# Altium PCB retic.PcbDoc
Units mil, origin at the board's own origin, x right, y up, seen from the top; angles counter-clockwise.
Board outline 4500 x 4100 mil, 2 copper layers (Top Layer, Bottom Layer); 102 components, 91 nets, 281 pads, 0 vias.
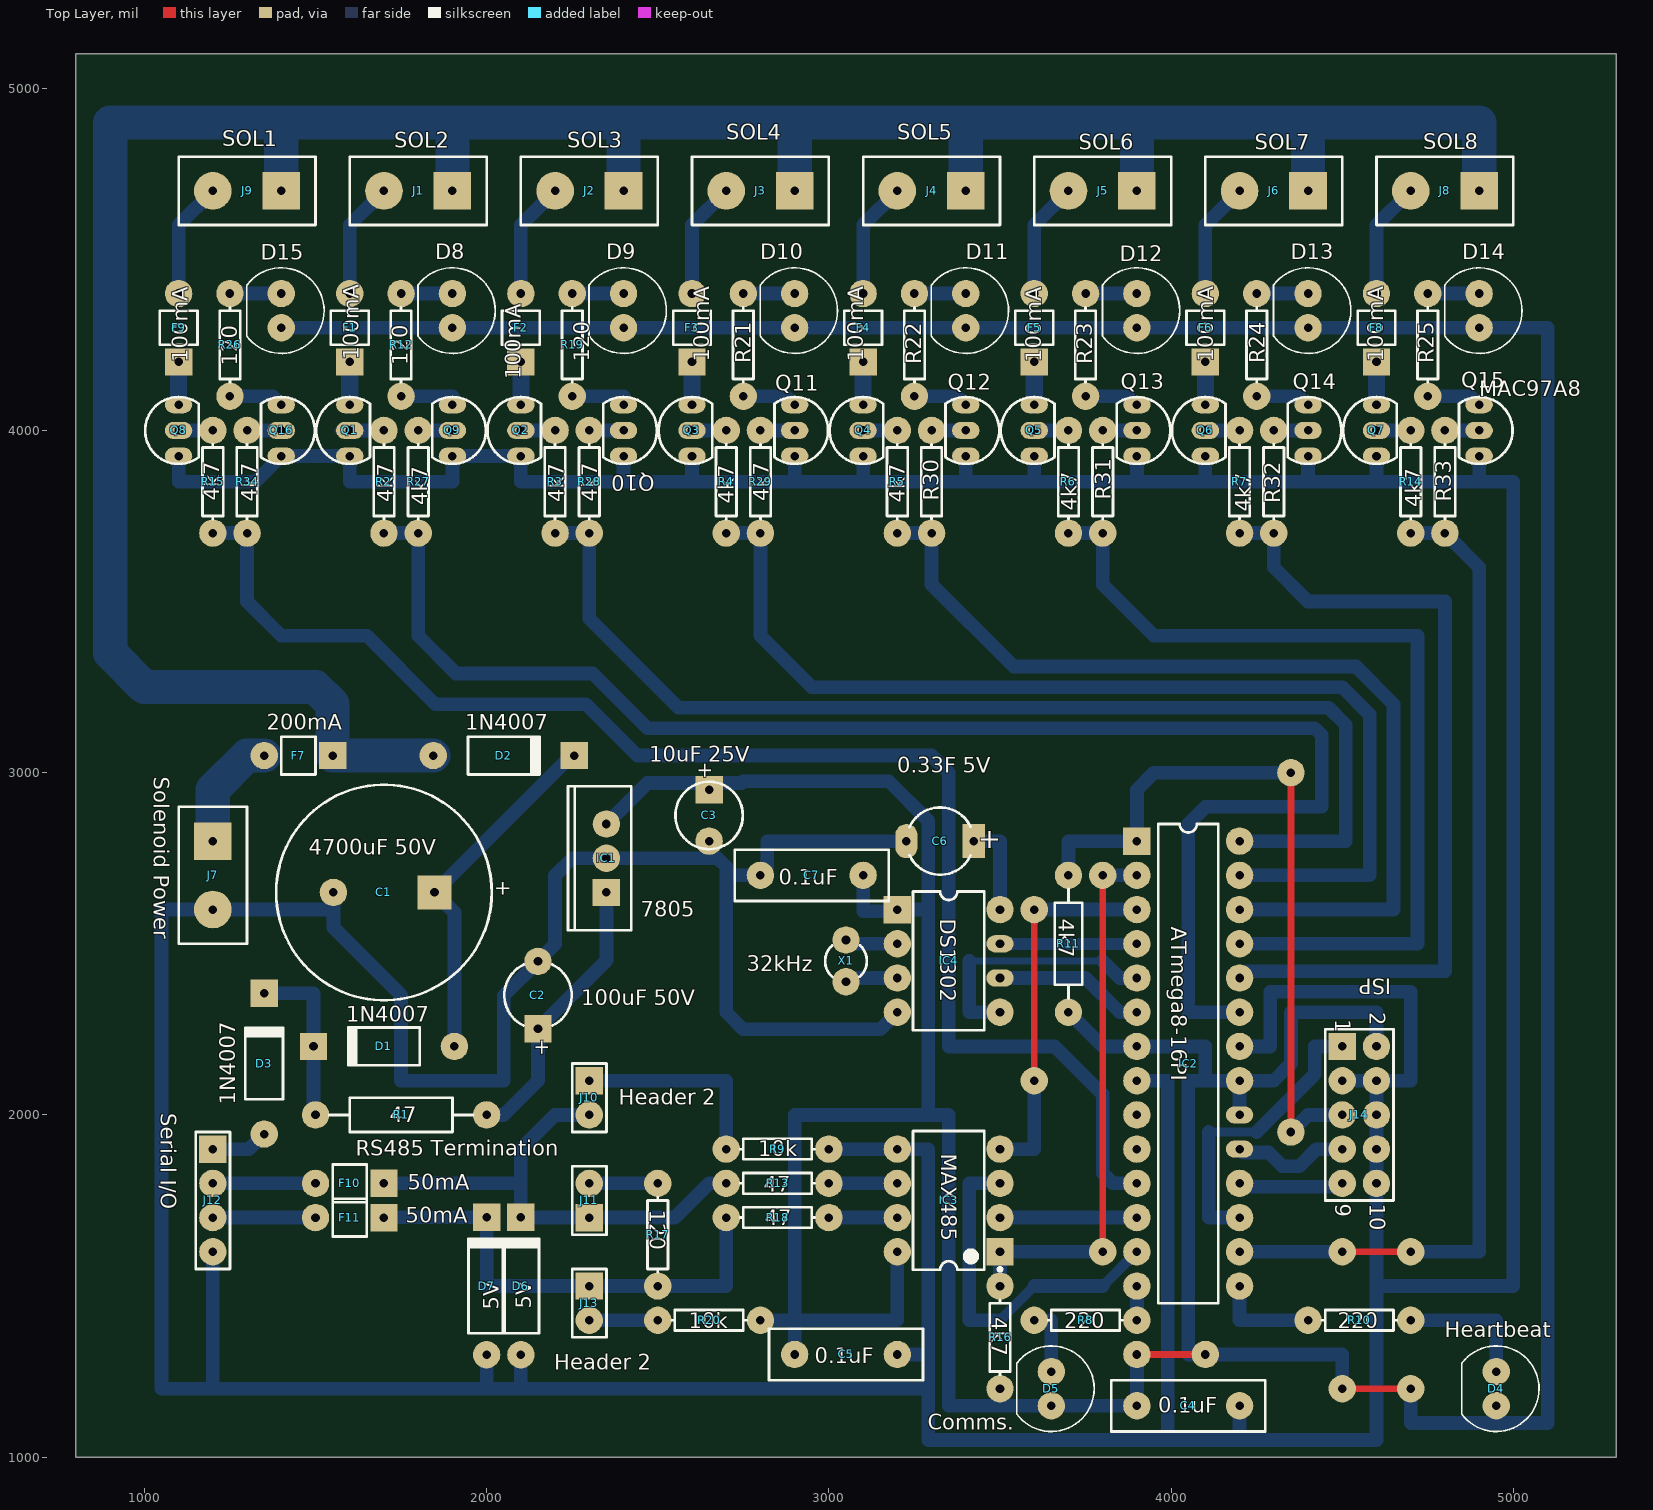
[diagram p0: Top Layer view]
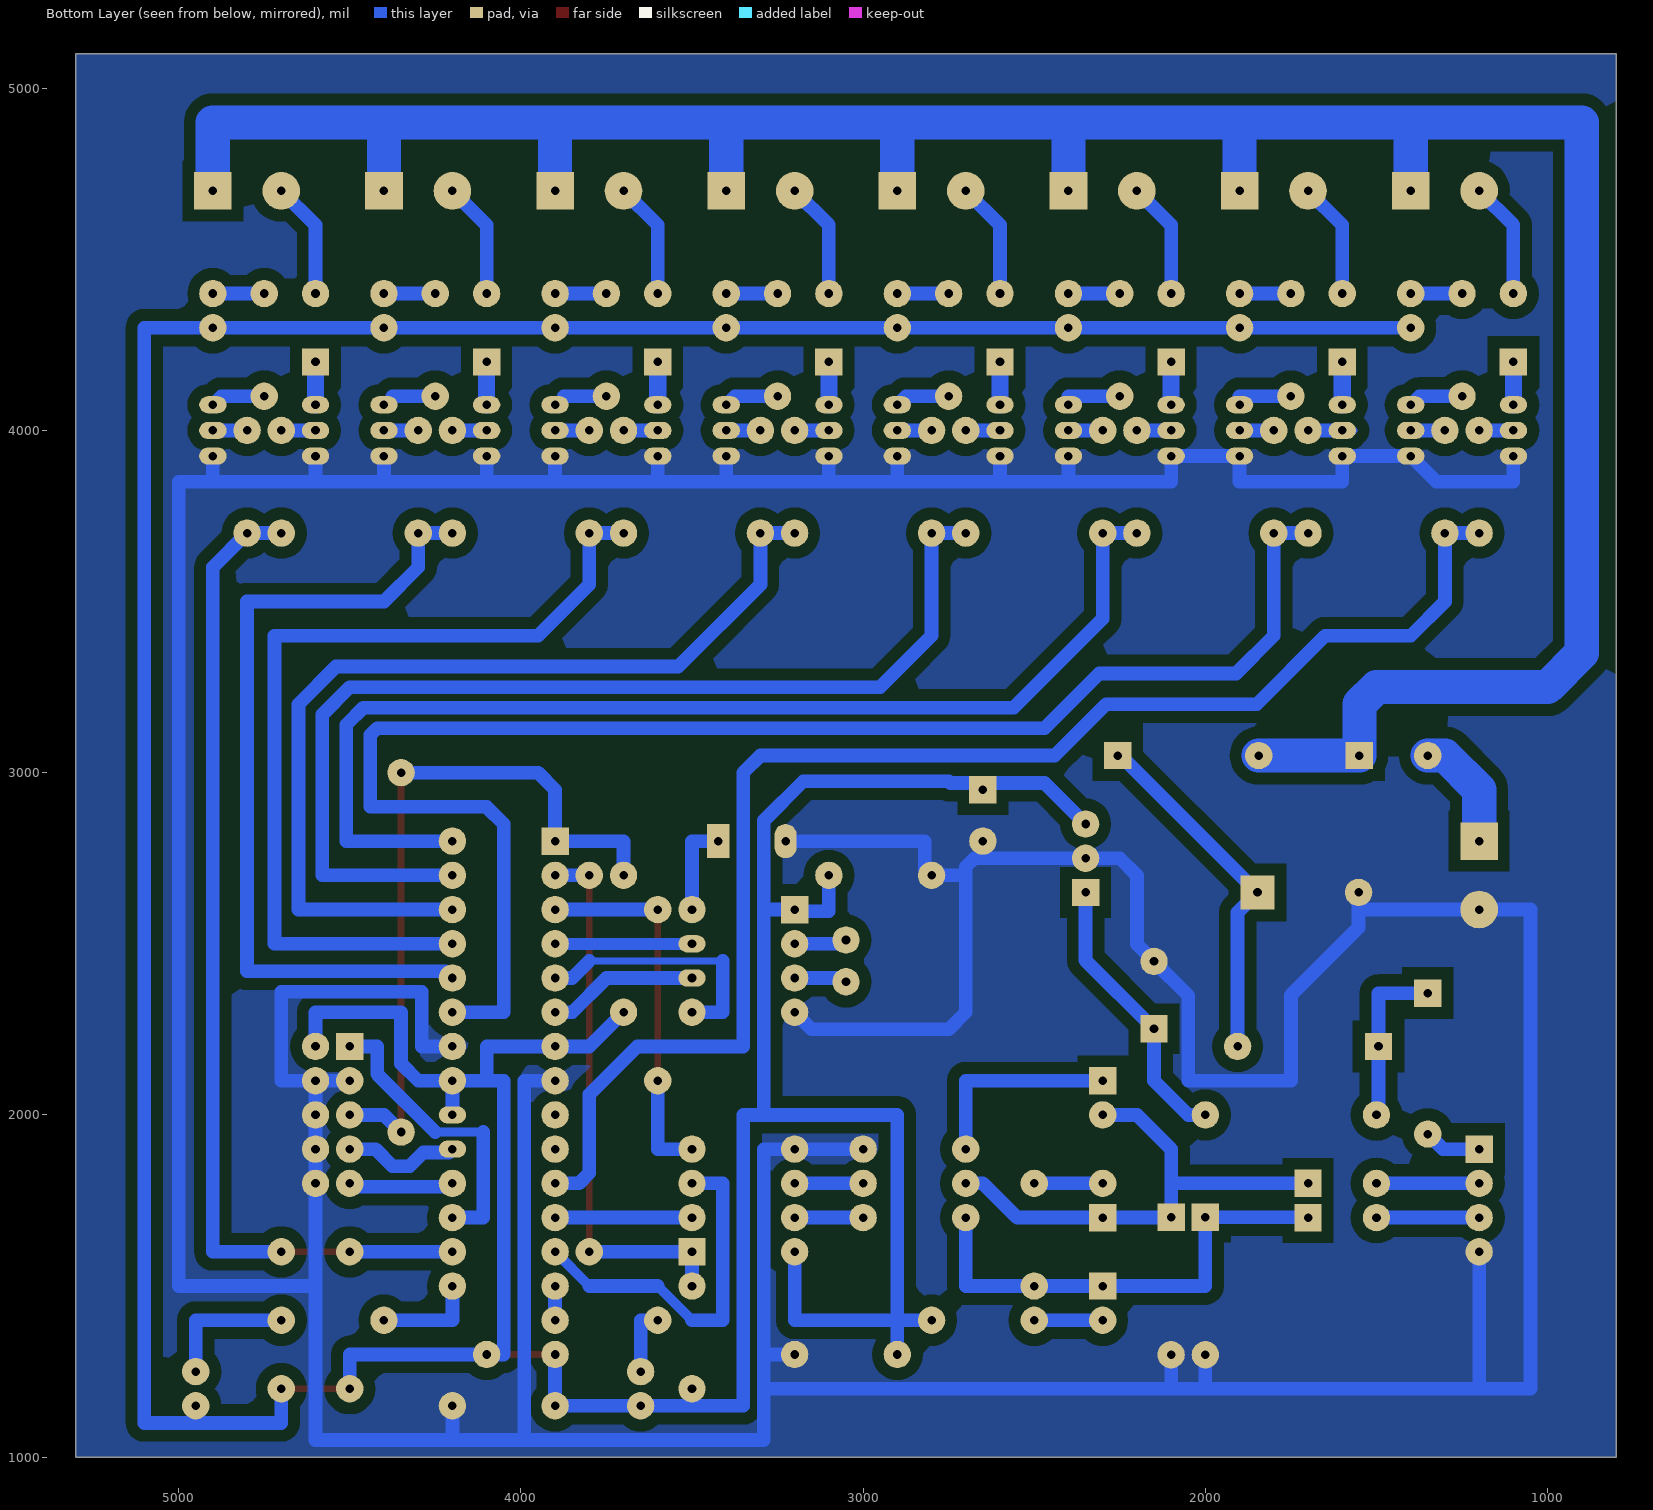
[diagram p1: Bottom Layer view, seen from below]

## Layer stack, top to bottom
Top Layer: signal copper 1.4
Dielectric: dielectric 12.6, FR-4, Dk 4.8
Bottom Layer: signal copper 1.4

## Board outline
800,1000 5300,1000 5300,5100 800,5100

## Design rules (kind name [scope] priority, off if disabled: settings)
Clearance [All] p1: gap=35
PolygonConnect [All] p1: connectstyle=Direct reliefconductorwidth=10 reliefentries=4 polygonreliefangle="90 Angle"
RoutingVias [All] p1: holewidth=28 width=50 viastyle="Through Hole" minholewidth=28 minwidth=50 maxholewidth=28 maxwidth=50
SilkToSilkClearance [All] p1 off: silktosilkclearance=10
SilkscreenOverComponentPads [All] p1 off: minsilkscreentomaskgap=10
SolderMaskExpansion [All] p1: expansion=4
Width [All] p1: maxlimit=100 minlimit=40 preferedwidth=40
26 further rules are at their usual default settings.

## Components (designator, comment, footprint, x,y, rotation, side; value= is the part's Value field where it differs from the comment)
C1 "4700uF 50V" CAPPR7.5-16x35 1700,2650 r180 top
C2 "100uF 50V" CAPPR5-5x5#1 2150,2350 r90 top
C3 "10uF 25V" CAPPR2-5x6.8 2650,2875 r270 top
C4 "0.1uF" RAD-0.3 4050,1150 r180 top
C5 "0.1uF" RAD-0.3 3050,1300 r180 top
C6 "0.33F 5V" CAPPR5-5x5#2 3325,2800 r180 top
C7 "0.1uF" RAD-0.3 2950,2700 r0 top
D1 "1N4007" DIO10.46-5.3x2.8 1700,2200 r180 top
D2 "1N4007" DIO10.46-5.3x2.8 2050,3050 r0 top
D3 "1N4007" DIO10.46-5.3x2.8 1350,2150 r90 top
D4 "Heartbeat" LED-0 4950,1200 r90 top
D5 "Comms." LED-0 3650,1200 r90 top
D6 "5V" DIO10.2-7x2.7 2100,1500 r90 top
D7 "5V" DIO10.2-7x2.7 2000,1500 r90 top
D8 "LED0" LED-0 1900,4350 r90 top
D9 "LED0" LED-0 2400,4350 r90 top
D10 "LED0" LED-0 2900,4350 r90 top
D11 "LED0" LED-0 3400,4350 r90 top
D12 "LED0" LED-0 3900,4350 r90 top
D13 "LED0" LED-0 4400,4350 r90 top
D14 "LED0" LED-0 4900,4350 r90 top
D15 "LED0" LED-0 1400,4350 r90 top
F1 "100mA" PIN-W2/E2.8 1600,4300 r90 top
F2 "100mA" PIN-W2/E2.8 2100,4300 r90 top
F3 "100mA" PIN-W2/E2.8 2600,4300 r90 top
F4 "100mA" PIN-W2/E2.8 3100,4300 r90 top
F5 "100mA" PIN-W2/E2.8 3600,4300 r90 top
F6 "100mA" PIN-W2/E2.8 4100,4300 r90 top
F7 "200mA" PIN-W2/E2.8 1450,3050 r180 top
F8 "100mA" PIN-W2/E2.8 4600,4300 r90 top
F9 "100mA" PIN-W2/E2.8 1100,4300 r90 top
F10 "50mA" PIN-W2/E2.8 1600,1800 r180 top
F11 "50mA" PIN-W2/E2.8 1600,1700 r180 top
IC1 "7805" TO220 2350,2750 r90 top
IC2 "ATmega8-16PI" 28P3 4050,2150 r270 top
IC3 "MAX485" PA8 3350,1750 r180 top
IC4 "DS1302" DIP8 3350,2450 r270 top
J1 "SOL2" SCREW2 1900,4700 r180 top
J2 "SOL3" SCREW2 2400,4700 r180 top
J3 "SOL4" SCREW2 2900,4700 r180 top
J4 "SOL5" SCREW2 3400,4700 r180 top
J5 "SOL6" SCREW2 3900,4700 r180 top
J6 "SOL7" SCREW2 4400,4700 r180 top
J7 "Solenoid Power" SCREW2 1200,2800 r270 top
J8 "SOL8" SCREW2 4900,4700 r180 top
J9 "SOL1" SCREW2 1400,4700 r180 top
J10 "Header 2" HDR1X2 2300,2100 r270 top
J11 "RS485 Termination" HDR1X2 2300,1700 r90 top
J12 "Serial I/O" HDR1X4 1200,1900 r270 top
J13 "Header 2" HDR1X2 2300,1500 r270 top
J14 "ISP" HDR2X5 4500,2200 r270 top
Q1 "MAC97A8" T092 1600,4000 r0 top
Q2 "MAC97A8" T092 2100,4000 r0 top
Q3 "MAC97A8" T092 2600,4000 r0 top
Q4 "MAC97A8" T092 3100,4000 r0 top
Q5 "MAC97A8" T092 3600,4000 r0 top
Q6 "MAC97A8" T092 4100,4000 r0 top
Q7 "MAC97A8" T092 4600,4000 r0 top
Q8 "MAC97A8" T092 1100,4000 r0 top
Q9 "2N3904" T092 1900,4000 r180 top
Q10 "2N3904" T092 2400,4000 r180 top
Q11 "2N3904" T092 2900,4000 r180 top
Q12 "2N3904" T092 3400,4000 r180 top
Q13 "2N3904" T092 3900,4000 r180 top
Q14 "2N3904" T092 4400,4000 r180 top
Q15 "2N3904" T092 4900,4000 r180 top
Q16 "2N3904" T092 1400,4000 r180 top
R1 "47" AXIAL-0.5 1750,2000 r0 top
R2 "4k7" AXIAL-0.3 1700,3850 r90 top
R3 "4k7" AXIAL-0.3 2200,3850 r90 top
R4 "4k7" AXIAL-0.3 2700,3850 r90 top
R5 "4k7" AXIAL-0.3 3200,3850 r90 top
R6 "4k7" AXIAL-0.3 3700,3850 r90 top
R7 "4k7" AXIAL-0.3 4200,3850 r90 top
R8 "220" AXIAL-0.3 3750,1400 r180 top
R9 "10k" AXIAL-0.3 2850,1900 r0 top
R10 "220" AXIAL-0.3 4550,1400 r0 top
R11 "4k7" AXIAL-0.4 3700,2500 r270 top
R12 "120" AXIAL-0.3 1750,4250 r90 top
R13 "47" AXIAL-0.3 2850,1800 r0 top
R14 "4k7" AXIAL-0.3 4700,3850 r90 top
R15 "4k7" AXIAL-0.3 1200,3850 r90 top
R16 "4k7" AXIAL-0.3 3500,1350 r270 top
R17 "120" AXIAL-0.3 2500,1650 r90 top
R18 "47" AXIAL-0.3 2850,1700 r0 top
R19 "120" AXIAL-0.3 2250,4250 r90 top
R20 "10k" AXIAL-0.3 2650,1400 r180 top
R21 "120" AXIAL-0.3 2750,4250 r90 top
R22 "120" AXIAL-0.3 3250,4250 r90 top
R23 "120" AXIAL-0.3 3750,4250 r90 top
R24 "120" AXIAL-0.3 4250,4250 r90 top
R25 "120" AXIAL-0.3 4750,4250 r90 top
R26 "120" AXIAL-0.3 1250,4250 r90 top
R27 "4k7" AXIAL-0.3 1800,3850 r90 top
R28 "4k7" AXIAL-0.3 2300,3850 r90 top
R29 "4k7" AXIAL-0.3 2800,3850 r90 top
R30 "4k7" AXIAL-0.3 3300,3850 r90 top
R31 "4k7" AXIAL-0.3 3800,3850 r90 top
R32 "4k7" AXIAL-0.3 4300,3850 r90 top
R33 "4k7" AXIAL-0.3 4800,3850 r90 top
R34 "4k7" AXIAL-0.3 1300,3850 r90 top
X1 "32kHz" BCY-W2/D3.1 3050,2450 r0 top

## Footprints (in the part's own frame and the unit in brackets; to place one, negate y for a bottom-side part, rotate by r counter-clockwise, add the part's x,y. Pads: shape width x height; smd on the part's side, far side on the other; paste and mask are expansions set on the pad)
28P3 [mil] "DIP; 28 Leads; Row Spacing 7.62 mm; Pitch 2.54 mm"
  rect 80x80 hole 25: 1(-650,-150)
  round 80 hole 25: 2(-550,-150) 3(-450,-150) 4(-350,-150) 5(-250,-150) 6(-150,-150) 7(-50,-150) 8(50,-150) 9(150,-150) 10(250,-150) 11(350,-150) 12(450,-150) 13(550,-150) 14(650,-150) 15(650,150) 16(550,150) 17(450,150) 18(350,150) 21(50,150) 22(-50,150) 23(-150,150) 24(-250,150) 25(-350,150) 26(-450,150) 27(-550,150) 28(-650,150)
  oval 50x80 hole 25: 19(250,150) 20(150,150)
  silkscreen extent -700,-88 700,88
AXIAL-0.3 [mil] "Axial Device, Thru-Hole; 2 Leads; 0.3 in Pin Spacing"
  round 80 hole 25: 1(-150,0) 2(150,0)
  silkscreen extent -109,-30 109,30
AXIAL-0.4 [mil] "Axial Device, Thru-Hole; 2 Leads; 0.4 in Pin Spacing"
  round 80 hole 25: 1(-200,0) 2(200,0)
  silkscreen extent -160,-40 160,40
AXIAL-0.5 [mil] "Axial Device, Thru-Hole; 2 Leads; 0.5 in Pin Spacing"
  round 80 hole 25: 1(-250,0) 2(250,0)
  silkscreen extent -210,-50 210,50
BCY-W2/D3.1 [mil] "Crystal, Thru-Hole; 2 Leads; Body 3.1 x 8.2 mm (Dia.xH)"
  round 80 hole 25: 1(0,61.02) 2(0,-61.02)
  silkscreen extent -61,-47 61,46
CAPPR2-5x6.8 [mil] "Capacitor, Electrolytic, Radial; Body 5 x 6.8 mm (Dia.xH typ); Pin Spacing 2 mm (typ)"
  rect 80x80 hole 25: 1(-75,0)
  round 80 hole 25: 2(75,0)
  silkscreen extent -98,-98 98,98
CAPPR5-5x5#1 [mil] "Capacitor, Electrolytic, Radial; Body 5 x 5 mm (Dia.xH typ); Pin Spacing 5 mm (typ)"
  rect 80x80 hole 25: 1(-98.43,0)
  round 80 hole 25: 2(98.43,0)
  silkscreen extent -89,-98 89,98
CAPPR5-5x5#2 [mil] "Capacitor, Electrolytic, Radial; Body 5 x 5 mm (Dia.xH typ); Pin Spacing 5 mm (typ)"
  rect 65x100 hole 25: 1(-98.43,0)
  oval 65x100 hole 25: 2(98.43,0)
  silkscreen extent -89,-98 89,98
CAPPR7.5-16x35 [mil] "Capacitor, Electrolytic, Radial; Body 16 x 35 mm (Dia.xH typ); Pin Spacing 7.5 mm (typ)"
  rect 100x100 hole 25: 1(-147.64,0)
  round 80 hole 25: 2(147.64,0)
  silkscreen extent -315,-315 315,315
DIO10.2-7x2.7 [mil] "Diode, Axial; Body 7 x 2.7 mm (LxDia. max), Lead Dia. 0.53 mm (max)"
  round 80 hole 25: 1(-200.79,0)
  rect 80x80 hole 25: 2(200.79,0)
  silkscreen extent -138,-53 142,53
DIO10.46-5.3x2.8 [mil] "Diode, Axial; Body 5.2 x 2.7 mm (LxDia. max), Lead Dia. 0.86 mm (max)"
  round 80 hole 25: 1(-205.91,0)
  rect 80x80 hole 25: 2(205.91,0)
  silkscreen extent -104,-55 108,55
DIP8 [mil] "DIP; 8 Leads; Row Spacing 7.62 mm; Pitch 2.54 mm"
  rect 80x80 hole 25: 1(-150,-150)
  round 80 hole 25: 2(-50,-150) 3(50,-150) 4(150,-150) 5(150,150) 8(-150,150)
  oval 50x80 hole 25: 6(50,150) 7(-50,150)
  silkscreen extent -203,-104 203,104
HDR1X2 [mil] "Connector; Header; 2 Position"
  rect 80x80 hole 25: 1(0,0)
  round 80 hole 25: 2(100,0)
  silkscreen extent -50,-50 150,50
HDR1X4 [mil] "Connector; Header; 4 Position"
  rect 80x80 hole 25: 1(0,0)
  round 80 hole 25: 2(100,0) 3(200,0) 4(300,0)
  silkscreen extent -50,-50 350,50
HDR2X5 [mil] "Connector; Header; 5x2 Position"
  rect 80x80 hole 25: 1(0,0)
  round 80 hole 25: 2(0,100) 3(100,0) 4(100,100) 5(200,0) 6(200,100) 7(300,0) 8(300,100) 9(400,0) 10(400,100)
  silkscreen extent -50,-50 450,150
LED-0 [mil] "Typical INFRARED GaAs LED; 2 Leads"
  round 80 hole 25: 1(50,0) 2(-50,0)
  silkscreen extent -125,-125 125,101
PA8 [mil] "DIP, 8-Leads, Row Spacing 7.62mm, Pitch 2.54mm, Body 9.38x7.24mm"
  rect 80x80 hole 25: 1(-150,150)
  round 80 hole 25: 2(-150,50) 3(-150,-50) 4(-150,-150) 5(150,-150) 6(150,-50) 7(150,50) 8(150,150)
  silkscreen extent -155,-203 104,206, body extent -142,-203 142,203, height 180
PIN-W2/E2.8 [mil] "Fuse; 2 Leads"
  rect 80x80 hole 25: 1(-100,0)
  round 80 hole 25: 2(100,0)
  silkscreen extent -50,-55 50,55
RAD-0.3 [mil] "Radial Cap, Thru-Hole; 2 Leads; 0.3 in Pin Spacing"
  round 80 hole 25: 1(-150,0) 2(150,0)
  silkscreen extent -225,-75 225,75
SCREW2 [mil] "Connector; Header; 2 Position"
  rect 110x110 hole 25: 1(0,0)
  round 110 hole 25: 2(200,0)
  silkscreen extent -100,-100 300,100
T092 [mil] "TO, Flat Index; 3 In-Line, Axial Leads; Body Dia. 4.7mm; Leads 0.56 x 0.51 mm (max)"
  oval 80x50 hole 25: 1(0,75) 2(0,0) 3(0,-75)
  silkscreen extent -98,-98 59,98
TO220 [mil] "TO, Thru-Hole, Vertical, Heatsink Mounted; 3 In-Line Leads; Pitch 2.54 mm"
  rect 80x80 hole 25: 1(-100,0)
  round 80 hole 25: 2(0,0) 3(100,0)
  silkscreen extent -211,-73 211,112

## Part data
C1 C2 C3 C6: library part "Cap Pol2", "Polarized Capacitor (Axial)"
C4 C5 C7: library part Cap, "Capacitor"
D1 D2 D3: library part "Diode 1N4007", "1 Amp General Purpose Rectifier"
D4 D5: library part LED1, "Typical RED GaAs LED"
D6 D7: library part Tranzorb, "Tranzorb"
D8 D9 D10 D11 D12 D13 D14 D15: "Typical INFRARED GaAs LED"
F1 F2 F3 F4 F5 F6 F7 F8 F9 F10 F11: library part "Fuse Thermal", "Thermal Fuse"
IC1: library part "Volt Reg", "Voltage Regulator"
IC2: "8-Bit AVR Microcontroller with 8K Bytes of In-System Programmable Flash Memory"
IC3: library part MAX485EPA, "Low-Power, Slew-Rate-Limited RS-485/RS-422 Transceiver"
IC4: "Trickle Charge Timekeeping Chip"
J1 J2 J3 J4 J5 J6 J7 J8 J9 J11: library part "Header 2", "Header, 2-Pin"
J10 J13: "Header, 2-Pin"
J12: library part "Header 4", "Header, 4-Pin"
J14: library part "Header 5X2", "Header, 5-Pin, Dual row"
Q1 Q2 Q3 Q4 Q5 Q6 Q7 Q8: library part Triac, "Silicon Bidirectional Triode Thyristor"
Q9 Q10 Q11 Q12 Q13 Q14 Q15 Q16: "NPN General Purpose Amplifier"
R1 R2 R3 R4 R5 R6 R7 R8 R9 R10 R11 R12 R13 R14 R15 R16 R17 R18 R19 R20 R21 R22 R23 R24 R25 R26 R27 R28 R29 R30 R31 R32 R33 R34: library part Res2, "Resistor"
X1: library part XTAL, "Crystal Oscillator"

## Free pads (board coordinates)
  round 80 hole 25: 0(4500,1600) 2(4700,1600) 6(3600,2600) 7(3600,2100) 8(3800,2700) 9(3800,1600) 10(4350,3000) 11(4350,1950) 12(4100,1300) 13(3900,1300) 14(4500,1200) 15(4700,1200)

## Nets (pads, with @x,y where several pads share a name; then routed paths per layer and width w, separated by ;. In a path a pad name is that pad's centre, name@x,y a point inside that pad or via, vN(x,y) a via of type N, cw(c..) or ccw(c..) an arc to the next point about the centre after c; other vN are vias at no path point)
+5V: C3.1 C4.2 C5.2 C7.2 D4.2 D5.2 D8.2 D9.2 D10.2 D11.2 D12.2 D13.2 D14.2 D15.2 IC1.3 IC2.7 IC2.20 IC2.21 IC3.8 IC4.1 J14.2 pad.12 pad.13 pad.14 pad.15 R11.2 R16.2 R20.1 | length 16201.5
  Top Layer w20: pad.13 pad.12 ; pad.14 pad.15
  Bottom Layer w40: D15.2 D8.2 D9.2 D10.2 D11.2 D12.2 D13.2 D14.2 5100,4300 5100,1100 4950,1100 ; IC1.3 2470,2970 2745,2970 2750,2975 3175,2975 3290,2860 3290,2600 ; R20.1 2900,1400 ; C5.2 2900,1400 ; C7.2 3100,2595.37 IC4.1@3195.37,2595.37 ; IC3.8 3200,1400 2900,1400 ; IC4.1 3290,2600 ; R16.2 3500,1150 ; R11.2 3800,2200 IC2.7 4100,2200 4100,2100 ; pad.13 C4.2 D5.2 3500,1150 ; IC2.20 IC2.21 ; pad.14 4500,1300 4050,1300 4050,2100 4100,2100 ; J14.2 4600,2300 4350,2300 4350,2150 4300,2100 IC2.21 ; pad.15 4700,1100 4950,1100 ; D4.2 4950,1100 ; 2900,1400 2900,2000 3290,2000 ; 3290,2000 3350,2000 3350,1150 3500,1150 ; 3290,2000 3290,2600 ; 4100,2100 IC2.21
DRV0: IC2.23 R2.1 R27.1 | length 4480.8
  Bottom Layer w40: R2.1 R27.1 1800,3400 1910,3290 2310,3290 2470,3130 4420,3130 4440,3110 4440,2900 4100,2900 4050,2850 4050,2300 IC2.23
DRV1: IC2.28 R3.1 R28.1 | length 3338.4
  Bottom Layer w40: R3.1 R28.1 2300,3450 2560,3190 4460,3190 4510,3140 4510,2800 IC2.28
DRV2: IC2.27 R4.1 R29.1 | length 3125.3
  Bottom Layer w40: R4.1 R29.1 2800,3400 2950,3250 4500,3250 4580,3170 4580,2700 IC2.27
DRV3: IC2.26 R5.1 R30.1 | length 2795
  Bottom Layer w40: R5.1 R30.1 3300,3550 3540,3310 4540,3310 4650,3200 4650,2600 IC2.26
DRV4: IC2.25 R6.1 R31.1 | length 2652.1
  Bottom Layer w40: R6.1 R31.1 3800,3550 3950,3400 4720,3400 4720,2500 IC2.25
DRV5: IC2.24 R7.1 R32.1 | length 2429.7
  Bottom Layer w40: IC2.24 4220,2420 4800,2420 4800,3500 4400,3500 4300,3600 R32.1 R7.1
DRV6: IC2.16 pad.0 pad.2 R14.1 R33.1 | length 2941.4
  Top Layer w20: pad.0 pad.2
  Bottom Layer w40: IC2.16 pad.0 ; pad.2 4900,1600 4900,3600 R33.1 R14.1
DRV7: IC2.11 R15.1 R34.1 | length 4207.5
  Bottom Layer w40: R15.1 R34.1 1300,3500 1400,3400 1650,3400 1850,3200 2290,3200 2440,3050 3300,3050 3350,3000 3350,2200 3660,2200 3800,2060 3800,1830 3830,1800 IC2.11
GND: C1.2 C2.2 C3.2 C4.1 C5.1 C6.2 C7.1 D6.1 D7.1 IC1.2 IC2.8 IC2.22 IC3.5 IC4.4 J7.2 J12.4 J14.3 J14.4 J14.6 J14.8 J14.10 Q1.3 Q2.3 Q3.3 Q4.3 Q5.3 Q6.3 Q7.3 Q8.3 Q9.1 Q10.1 Q11.1 Q12.1 Q13.1 Q14.1 Q15.1 Q16.1 R9.2 | length 22270.8
  Bottom Layer w40: Q8.3 1100,3850 1250,3850 ; J12.4 1200,1200 ; 1225,3850 1250,3850 ; Q16.1@1425,3925 Q16.1 ; 1550,2600 J7.2 1050,2600 1050,1200 1200,1200 ; C1.2 1552.36,2547.64 1750,2350 1750,2100 2050,2100 2050,2348.43 C2.2 2200,2498.43 2200,2700 2250,2750 IC1.2 2675,2750 2700,2725 2700,2700 ; Q9.1@1900,3920 1900,3850 1600,3850 Q1.3 Q16.1 ; 1950,3925 Q9.1 Q2.3 2100,3850 2400,3850 ; D7.1 2000,1200 ; D6.1 2100,1200 ; Q10.1 2400,3850 ; Q3.3@2600,3920 2600,3850 ; Q11.1@2900,3920 2900,3850 ; R9.2 IC3.5 3290,1900 3290,1300 ; Q4.3 3100,3850 ; C5.1 3290,1300 ; IC4.4 3150,2250 2750,2250 2700,2300 2700,2700 ; C6.2 2820,2800 2820,2720 C7.1 2700,2700 ; Q12.1@3400,3900 Q12.1@3400,3920 ; Q12.1 Q12.1@3400,3920 ; Q5.3 3600,3850 ; IC2.8 3990,2100 3990,1050 3290,1050 3290,1200 ; Q13.1 3900,3850 ; 4000,1050 4200,1050 ; Q6.3 4100,3850 ; C4.1 4200,1050 ; IC2.22 4290,2200 4290,2360 4700,2360 4700,2100 J14.4 ; Q14.1 4400,3850 ; J14.3 J14.4 ; Q7.3 4600,3850 ; Q15.1@4900,3900 4900,3850 ; 1200,1200 2000,1200 ; 1250,3850 1325,3850 Q16.1 ; 2000,1200 2100,1200 ; 2100,1200 3290,1200 ; 2400,3850 2600,3850 ; 2600,3850 2900,3850 ; 2900,3850 3100,3850 ; 3100,3850 3400,3850 ; 3290,1200 3290,1300 ; 3400,3850 Q12.1@3400,3920 ; 3400,3850 3600,3850 ; 3600,3850 3900,3850 ; 3900,3850 4100,3850 ; 4100,3850 4400,3850 ; 4200,1050 4600,1050 4600,1500 ; 4400,3850 4600,3850 ; 4600,1500 J14.10 J14.8 J14.6 J14.4 ; 4600,1500 5000,1500 5000,3850 4900,3850 ; 4600,3850 4900,3850
MISO: IC2.18 J14.9 | length 300
  Bottom Layer w40: IC2.18@4190,1790 J14.9@4490,1790
MOSI: IC2.17 J14.1 | length 880.4
  Bottom Layer w25: 4110,1950 4250,1950
  Bottom Layer w40: 4110,1950 4110,1700 IC2.17 ; 4250,1950 4420,2120 4420,2200 J14.1
NetC1_1: C1.1 D1.1 D2.2 | length 1048.1
  Bottom Layer w40: D1.1 1905.91,2591.73 C1.1 2247.64,3050 D2.2
NetC2_1: C2.1 IC1.1 R1.2 | length 824.3
  Bottom Layer w40: R1.2 2050,2000 2150,2100 C2.1 2350,2451.57 IC1.1
NetC6_1: C6.1 IC4.8 | length 276.6
  Bottom Layer w40: C6.1 3500,2800 IC4.8
NetD1_2: D1.2 D3.2 R1.1 | length 502.4
  Bottom Layer w40: D3.2 1494.09,2355.91 D1.2 1494.09,2005.91 R1.1
NetD3_1: D3.1 J12.1 | length 168.3
  Bottom Layer w40: J12.1 1305.91,1900 D3.1
NetD4_1: D4.1 R10.2 | length 400
  Bottom Layer w40: R10.2 4950,1400 D4.1
NetD5_1: D5.1 R8.2 | length 200
  Bottom Layer w40: R8.2 3650,1400 D5.1
NetD6_2: D6.2 F10.1 J10.2 J11.1 R13.1 | length 1482.4
  Bottom Layer w40: F10.1 2100,1800 ; J10.2 2200,2000 2100,1900 2100,1800 ; R13.1 2650,1800 2550,1700 J11.1 2100.79,1700 D6.2 2100,1800
NetD7_2: D7.2 F11.1 J13.1 R17.1 R18.1 | length 1400.8
  Bottom Layer w40: F11.1@1700,1700.79 D7.2 2000,1500 J13.1 R17.1 2700,1500 R18.1
NetD8_1: D8.1 R12.2 | length 150
  Bottom Layer w40: R12.2 D8.1
NetD9_1: D9.1 R19.2 | length 150
  Bottom Layer w40: R19.2 D9.1
NetD10_1: D10.1 R21.2 | length 150
  Bottom Layer w40: R21.2 D10.1
NetD11_1: D11.1 R22.2 | length 150
  Bottom Layer w40: R22.2 D11.1
NetD12_1: D12.1 R23.2 | length 150
  Bottom Layer w40: R23.2 D12.1
NetD13_1: D13.1 R24.2 | length 150
  Bottom Layer w40: R24.2 D13.1
NetD14_1: D14.1 R25.2 | length 150
  Bottom Layer w40: R25.2 D14.1
NetD15_1: D15.1 R26.2 | length 150
  Bottom Layer w40: R26.2 D15.1
NetF1_1: F1.1 Q1.1 | length 125
  Bottom Layer w50: Q1.1 F1.1
NetF1_2: F1.2 J1.2 | length 341.4
  Bottom Layer w40: F1.2 1600,4600 J1.2
NetF2_1: F2.1 Q2.1 | length 125
  Bottom Layer w50: Q2.1 F2.1
NetF2_2: F2.2 J2.2 | length 362.1
  Bottom Layer w40: F2.2 2100,4600 J2.2 J2.2@2200,4720.67
NetF3_1: F3.1 Q3.1 | length 125
  Bottom Layer w50: Q3.1 F3.1
NetF3_2: F3.2 J3.2 | length 362.1
  Bottom Layer w40: F3.2 2600,4500 ; 2600,4479.33 2600,4500 ; J3.2 2600,4600 2600,4500
NetF4_1: F4.1 Q4.1 | length 125
  Bottom Layer w50: Q4.1 F4.1
NetF4_2: F4.2 J4.2 | length 341.4
  Bottom Layer w40: F4.2 3100,4600 J4.2
NetF5_1: F5.1 Q5.1 | length 125
  Bottom Layer w50: Q5.1 F5.1
NetF5_2: F5.2 J5.2 | length 341.4
  Bottom Layer w40: F5.2 3600,4600 J5.2
NetF6_1: F6.1 Q6.1 | length 125
  Bottom Layer w50: Q6.1 F6.1
NetF6_2: F6.2 J6.2 | length 341.4
  Bottom Layer w40: F6.2 4100,4600 J6.2
NetF7_2: F7.2 J7.1 | length 341.4
  Bottom Layer w100: J7.1 1200,2950 1300,3050 F7.2
NetF8_1: F8.1 Q7.1 | length 125
  Bottom Layer w50: Q7.1 F8.1
NetF8_2: F8.2 J8.2 | length 341.4
  Bottom Layer w40: F8.2 4600,4600 J8.2
NetF9_1: F9.1 Q8.1 | length 125
  Bottom Layer w50: Q8.1 F9.1
NetF9_2: F9.2 J9.2 | length 341.4
  Bottom Layer w40: F9.2 1100,4600 J9.2
NetF10_2: F10.2 J12.2 | length 300
  Bottom Layer w40: J12.2 F10.2
NetF11_2: F11.2 J12.3 | length 300
  Bottom Layer w40: J12.3 F11.2
NetIC2_2: IC2.2 IC3.1 pad.8 pad.9 R16.1 | length 1600
  Top Layer w20: pad.9 pad.8
  Bottom Layer w40: R16.1 IC3.1 pad.9 ; pad.8 IC2.2
NetIC2_3: IC2.3 IC3.4 pad.6 pad.7 | length 1100
  Top Layer w20: pad.7 pad.6
  Bottom Layer w40: IC3.4 3600,1900 pad.7 ; pad.6 IC2.3
NetIC2_12: IC2.12 IC3.2 | length 400
  Bottom Layer w40: IC3.2 IC2.12
NetIC2_13: IC2.13 IC3.3 | length 1062.8
  Bottom Layer w30: 3500,1400 3600,1500 ; 3800,1500 IC2.13
  Bottom Layer w40: 3500,1400 3410,1400 3410,1800 IC3.3 ; 3600,1500 3800,1500
NetIC2_14: IC2.14 R8.1 | length 100
  Bottom Layer w40: R8.1 IC2.14
NetIC2_15: IC2.15 R10.1 | length 300
  Bottom Layer w40: IC2.15 4200,1400 R10.1
NetIC3_6: IC3.6 R13.2 | length 200
  Bottom Layer w40: R13.2 IC3.6
NetIC3_7: IC3.7 R18.2 | length 200
  Bottom Layer w40: R18.2 3100,1700 IC3.7
NetIC4_2: IC4.2 X1.1 | length 154.6
  Bottom Layer w40: X1.1 3061.02,2500 IC4.2
NetIC4_3: IC4.3 X1.2 | length 154.6
  Bottom Layer w40: X1.2 3061.02,2400 IC4.3
NetJ10_1: J10.1 R9.1 | length 600
  Bottom Layer w40: J10.1 2700,2100 R9.1
NetJ11_2: J11.2 R17.2 | length 200
  Bottom Layer w40: J11.2 2400,1800 R17.2
NetJ13_2: J13.2 R20.2 | length 200
  Bottom Layer w40: J13.2 R20.2
NetQ1_2: Q1.2 R2.2 | length 135
  Bottom Layer w20: Q1.2@1565,4000 Q1.2
  Bottom Layer w40: Q1.2 R2.2
NetQ2_2: Q2.2 R3.2 | length 100
  Bottom Layer w40: Q2.2 R3.2
NetQ3_2: Q3.2 R4.2 | length 100
  Bottom Layer w40: Q3.2 R4.2
NetQ4_2: Q4.2 R5.2 | length 100
  Bottom Layer w40: Q4.2 R5.2
NetQ5_2: Q5.2 R6.2 | length 100
  Bottom Layer w40: Q5.2 R6.2
NetQ6_2: Q6.2 R7.2 | length 100
  Bottom Layer w40: Q6.2 R7.2
NetQ7_2: Q7.2 R14.2 | length 100
  Bottom Layer w40: Q7.2 R14.2
NetQ8_2: Q8.2 R15.2 | length 100
  Bottom Layer w40: Q8.2 R15.2
NetQ9_2: Q9.2 R27.2 | length 100
  Bottom Layer w40: R27.2 Q9.2
NetQ9_3: Q9.3 R12.1 | length 150
  Bottom Layer w40: R12.1 1900,4100
NetQ10_2: Q10.2 R28.2 | length 100
  Bottom Layer w40: R28.2 Q10.2
NetQ10_3: Q10.3 R19.1 | length 175
  Bottom Layer w40: R19.1 2400,4100 Q10.3
NetQ11_2: Q11.2 R29.2 | length 100
  Bottom Layer w40: R29.2 Q11.2
NetQ11_3: Q11.3 R21.1 | length 160.4
  Bottom Layer w40: R21.1 2875,4100 Q11.3
NetQ12_2: Q12.2 R30.2 | length 100
  Bottom Layer w40: R30.2 Q12.2
NetQ12_3: Q12.3 R22.1 | length 160.4
  Bottom Layer w40: R22.1 3375,4100 Q12.3
NetQ13_2: Q13.2 R31.2 | length 100
  Bottom Layer w40: R31.2 Q13.2
NetQ13_3: Q13.3 R23.1 | length 125
  Bottom Layer w40: R23.1 3875,4100
NetQ14_2: Q14.2 R32.2 | length 100
  Bottom Layer w40: R32.2 Q14.2
NetQ14_3: Q14.3 R24.1 | length 125
  Bottom Layer w40: R24.1 4375,4100
NetQ15_2: Q15.2 R33.2 | length 100
  Bottom Layer w40: R33.2 Q15.2
NetQ15_3: Q15.3 R25.1 | length 160.4
  Bottom Layer w40: R25.1 4875,4100 Q15.3
NetQ16_2: Q16.2 R34.2 | length 100
  Bottom Layer w40: R34.2 Q16.2
NetQ16_3: Q16.3 R26.1 | length 160.4
  Bottom Layer w40: R26.1 1375,4100 Q16.3
RESET: IC2.1 J14.5 pad.10 pad.11 R11.1 | length 2141.4
  Top Layer w20: pad.11 pad.10
  Bottom Layer w40: R11.1 3700,2800 IC2.1 3900,2950 3950,3000 pad.10 ; pad.11 4400,2000 J14.5
RTC.CE: IC2.5 IC4.5 | length 750.7
  Bottom Layer w20: 3410,2450 3800,2450
  Bottom Layer w40: 3410,2450 3410,2300 IC4.5 ; 3800,2450 3850,2400 IC2.5
RTC.CLK: IC2.4 IC4.7 | length 400
  Bottom Layer w35: IC4.7 IC2.4
RTC.IO: IC2.6 IC4.6 | length 441.4
  Bottom Layer w40: IC4.6 3750,2400 3850,2300 IC2.6
SCK: IC2.19 J14.7 | length 341.4
  Bottom Layer w40: IC2.19 4210,1890 4285,1890 4325,1850 4375,1850 4425,1900 J14.7
VSOL: D2.1 F7.1 J1.1 J2.1 J3.1 J4.1 J5.1 J6.1 J8.1 J9.1 | length 8306.2
  Bottom Layer w100: J9.1 1400,4900 ; D2.1 F7.1 1550,3200 1500,3250 1000,3250 900,3350 900,4900 1400,4900 ; J1.1 1900,4900 ; J2.1 2400,4900 ; J3.1 2900,4900 ; J4.1 3400,4900 ; J5.1 3900,4900 ; J6.1 4400,4900 ; J8.1 4900,4900 4400,4900 ; 1400,4900 1900,4900 ; 1900,4900 2400,4900 ; 2400,4900 2900,4900 ; 2900,4900 3400,4900 ; 3400,4900 3900,4900 ; 3900,4900 4400,4900
pads on no net: IC2.9 IC2.10

## Polygon pours and split planes (outlines as drawn)
GND on Bottom Layer "Bottom Layer-No Net" (solid, remove dead copper, pour order 2): 800,5100 5300,5100 5300,1000 800,1000

## Text inside footprints (layer, text, board x,y; h text height)
C1: Top Overlay "+" at 2073.03,2679.53 h45 r180
C2: Top Overlay "+" at 2179.53,2170.87 h45 r90
C3: Top Overlay "+" at 2620.47,3031.5 h45 r270
C6: Top Overlay "+" at 3504.13,2829.53 h59.06 r180
J14: Top Overlay "2" at 4580,2300 h45 r270; Top Overlay "1" at 4480,2280 h45 r270; Top Overlay "9" at 4480,1740 h45 r270; Top Overlay "10" at 4580,1740 h45 r270